# Altium PCB 两位数码管显示模块.PcbDoc
Units mm, origin at the board's own origin, x right, y up, seen from the top; angles counter-clockwise.
Board outline 152.4 x 101.6 mm, 2 copper layers (Top Layer, Bottom Layer); 15 components, 23 nets, 61 pads, 15 vias.
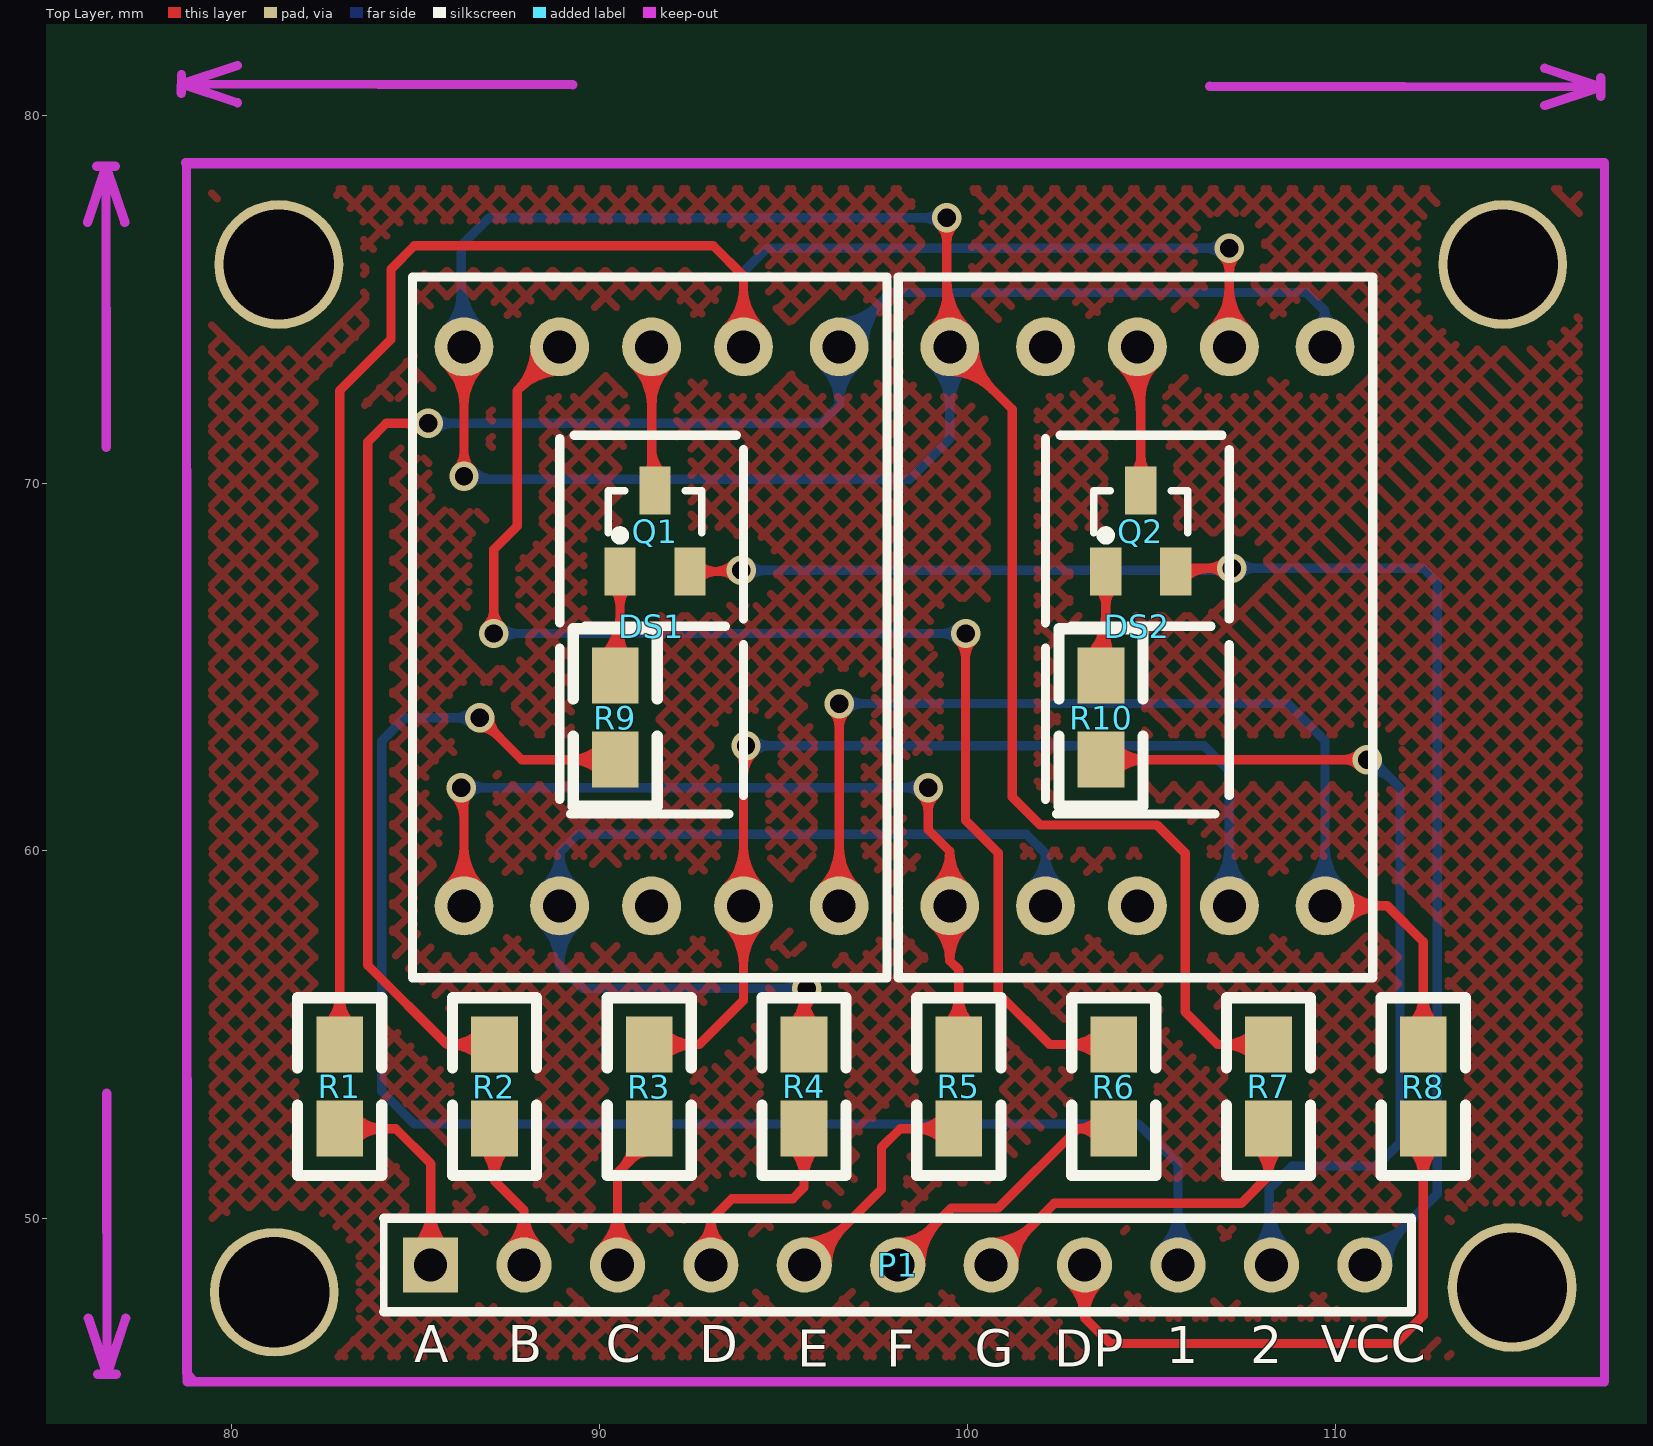
[diagram p0: Top Layer view]
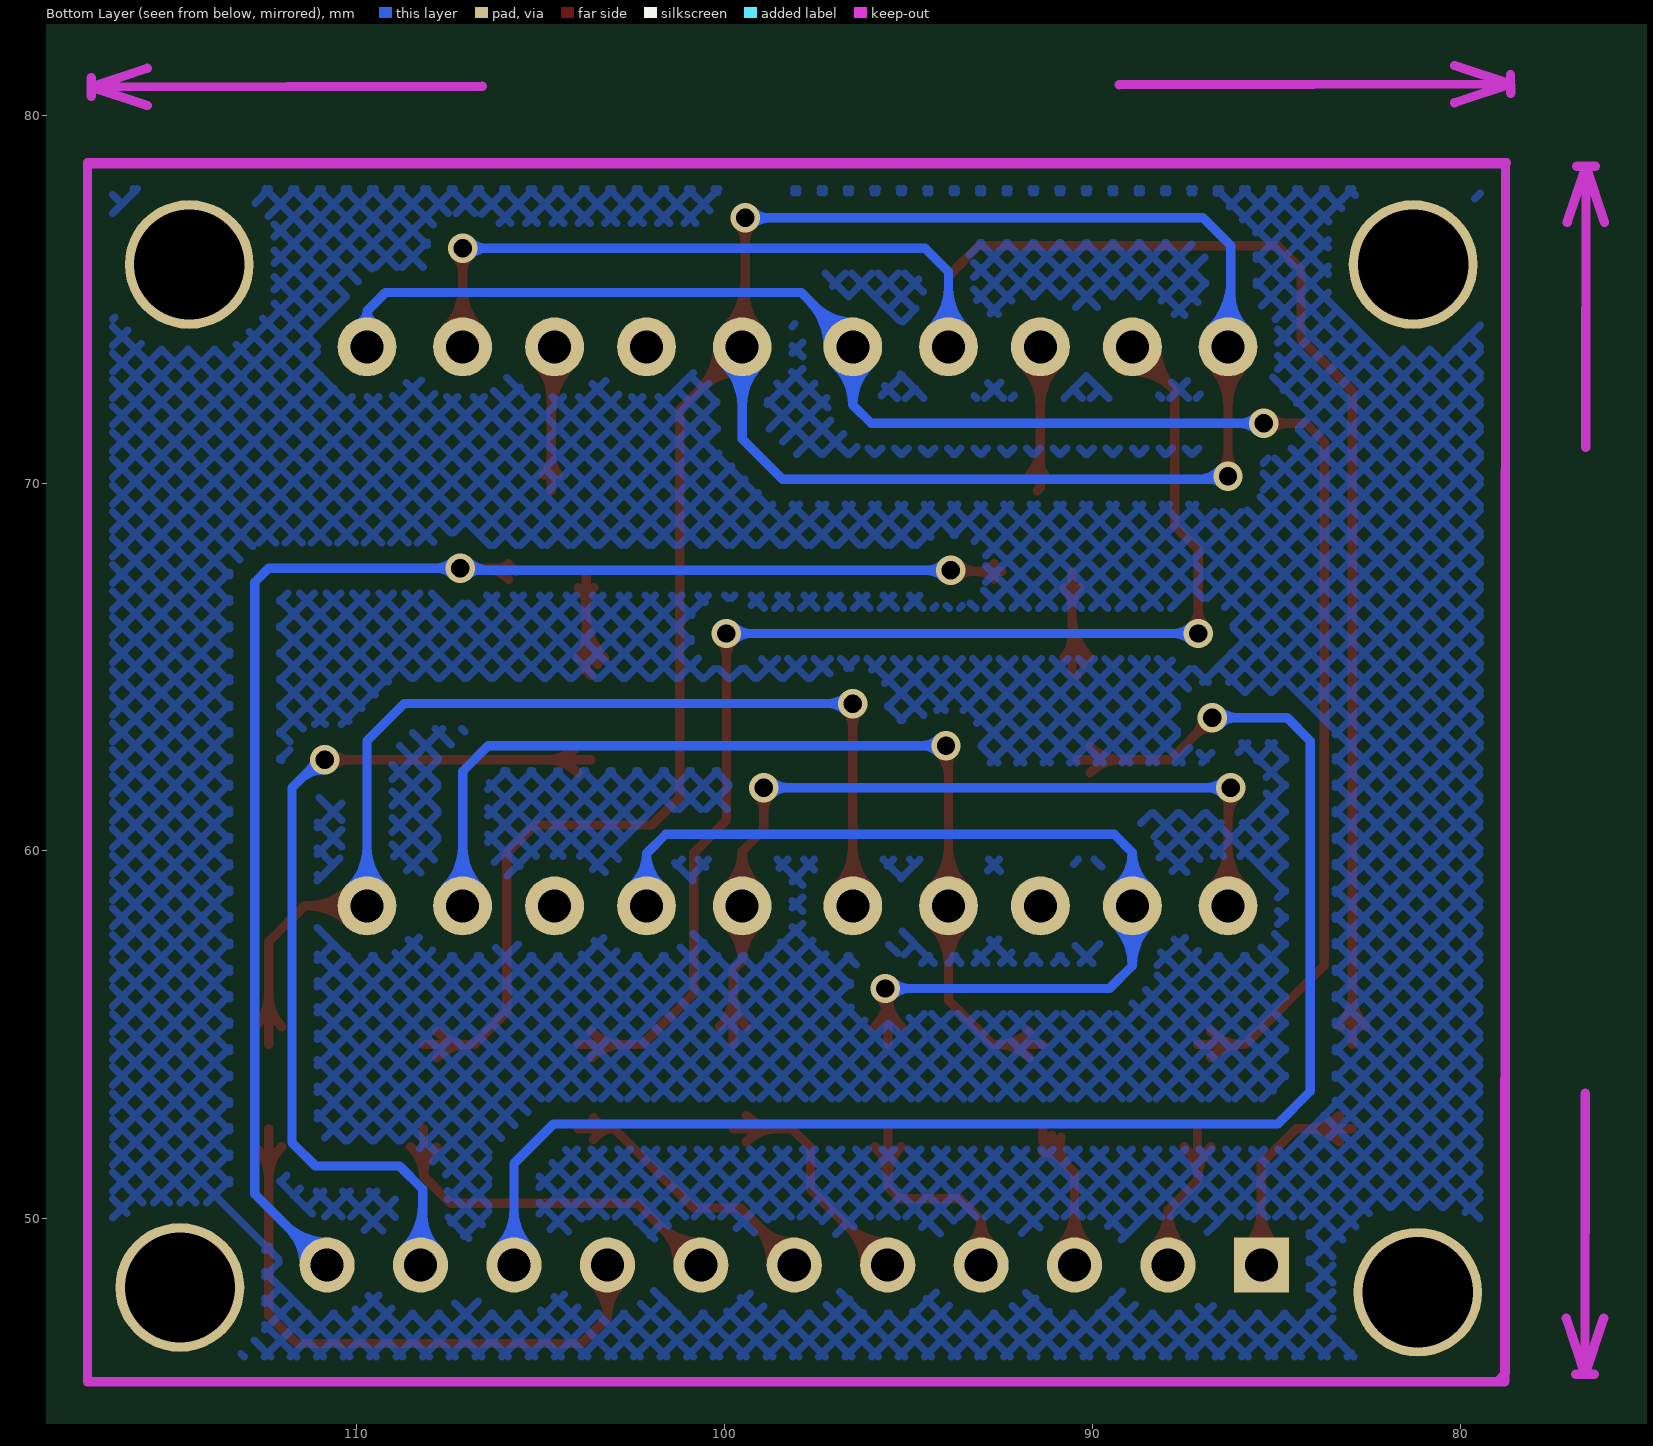
[diagram p1: Bottom Layer view, seen from below]

## Layer stack, top to bottom
Top Layer: signal copper 0.0356
Dielectric: dielectric 0.32, FR-4, Dk 4.8
Bottom Layer: signal copper 0.0356

## Board outline
25.4,25.4 177.8,25.4 177.8,127 25.4,127

## Design rules (kind name [scope] priority, off if disabled: settings)
Clearance [All] p1: gap=0.454
ComponentClearance [All] p1: gap=0.254 collisioncheckmode=0
PolygonConnect [All] p1: connectstyle=Relief reliefconductorwidth=0.254 reliefentries=4 polygonreliefangle="90 Angle"
RoutingVias [All] p1: holewidth=0.711 width=1.27 viastyle="Through Hole" minholewidth=0.711 minwidth=1.27 maxholewidth=0.711 maxwidth=1.27
SolderMaskExpansion [All] p1: expansion=0.102
TestPointUsage [All] p1: valid=0 allowmultiple=FALSE
Testpoint [All] p1: side=15 testpointundercomponent=TRUE minsize=1.016 maxsize=2.54 preferedsize=1.524 minholesize=0 maxholesize=1.016 preferedholesize=0.813 testpointgrid=0.025 style=1023 order=-539222988
Width [All] p1: maxlimit=0.254 minlimit=0.254 preferedwidth=0.254
17 further rules are at their usual default settings.

## Components (designator, comment, footprint, x,y, rotation, side; value= is the part's Value field where it differs from the comment)
DS1 "DLSMG_B" LED-BSR 91.313,63.627 r0 top
DS2 "DLSMG_B" LED-BSR 104.521,63.627 r0 top
P1 "PZ_10" HDR-10 98.044,48.768 r0 top
Q1 "TPSJG_PNP" SO-G3 92.456,68.58 r0 top
Q2 "TPSJG_PNP" SO-G3 105.664,68.58 r0 top
R1 "Res" 0805 82.931,52.451 r90 top
R2 "Res" 0805 87.14,52.451 r90 top
R3 "Res" 0805 91.349,52.451 r90 top
R4 "Res" 0805 95.558,52.451 r90 top
R5 "Res" 0805 99.768,52.451 r90 top
R6 "Res" 0805 103.977,52.451 r90 top
R7 "Res" 0805 108.186,52.451 r90 top
R8 "Res" 0805 112.395,52.451 r90 top
R9 "Res" 0805 90.424,62.484 r90 top
R10 "Res" 0805 103.632,62.484 r90 top

## Footprints (in the part's own frame and the unit in brackets; to place one, negate y for a bottom-side part, rotate by r counter-clockwise, add the part's x,y. Pads: shape width x height; smd on the part's side, far side on the other; paste and mask are expansions set on the pad)
0805 [mil]
  rect 60x50 smd: 1(0,0) 2(90,0)
  silkscreen extent -50,-45 140,45
HDR-10 [mm]
  rect 1.5x1.5 hole 0.9: 1(-12.639,-0.025)
  round 1.5 hole 0.9: 2(-10.099,-0.025) 3(-7.559,-0.025) 4(-5.019,-0.025) 5(-2.479,-0.025) 6(0.061,-0.025) 7(2.601,-0.025) 8(5.141,-0.025) 9(7.681,-0.025) 10(10.221,-0.025) 11(12.761,-0.025)
  silkscreen extent -13.91,-1.29 14.03,1.25
LED-BSR [mm] "独立数码管"
  round 1.6 hole 0.9: 1(-5,-5.119) 2(-2.4,-5.119) 3(0.1,-5.119) 4(2.6,-5.119) 5(5.2,-5.119) 6(5.2,10.081) 7(2.6,10.081) 8(0.1,10.081) 9(-2.4,10.081) 10(-5,10.081)
  silkscreen extent -6.4,-7.07 6.5,11.98
SO-G3 [mm]
  rect 0.85x1.3 smd: 1(-1.9,-0.983) 2(0,-0.983) 3(-0.95,1.217)
  silkscreen extent -2.23,-0.12 0.32,1.22

## Part data
DS1 DS2: "独立共阳数码管"
P1: "排针——10"
Q1 Q2: "贴片三极管——PNP"
R1 R2 R3 R4 R5 R6 R7 R8 R9 R10: "电阻"

## Free pads (board coordinates)
  round 3.5 hole 3: 0(81.153,48.006) 1(114.808,48.133) 2(114.554,75.946) 3(81.28,75.946)

## Via types
v1: diameter 0.8, hole 0.5, Top Layer to Bottom Layer, 15 vias

## Nets (pads, with @x,y where several pads share a name; then routed paths per layer and width w, separated by ;. In a path a pad name is that pad's centre, name@x,y a point inside that pad or via, vN(x,y) a via of type N, cw(c..) or ccw(c..) an arc to the next point about the centre after c; other vN are vias at no path point)
1: P1.1 R1.1 | length 11.3
  Top Layer w0.254: R1.1 84.455,52.451 85.405,51.501 P1.1 ; R1.1@83.29,52.092 cw(c84.157,51.225) 84.157,52.451 cw(c84.157,53.677) R1.1@83.29,52.81 ; P1.1@84.964,49.184 ccw(c83.901,50.247) 85.405,50.247 ccw(c86.909,50.247) P1.1@85.846,49.184 ; P1.1@85.144,49.004 ccw(c84.514,49.634) 85.405,49.634 ccw(c86.296,49.634) P1.1@85.666,49.004
2: P1.2 R2.1 | length 9.7
  Top Layer w0.254: R2.1@86.781,51.965 cw(c85.914,51.098) 87.14,51.098 cw(c88.367,51.098) R2.1@87.499,51.965 ; R2.1 87.14,51.036 87.945,50.231 ; P1.2@87.508,49.187 ccw(c86.48,50.231) 87.945,50.231 ; P1.2@87.686,49.006 ccw(c87.077,49.624) 87.945,49.624 ccw(c88.813,49.624) P1.2@88.204,49.006 ; P1.2 87.945,50.231 ; P1.2@88.382,49.187 cw(c89.41,50.231) 87.945,50.231
3: P1.3 R3.1 | length 10
  Top Layer w0.254: P1.3@90.044,49.184 ccw(c88.981,50.247) 90.485,50.247 ccw(c91.989,50.247) P1.3@90.926,49.184 ; P1.3@90.224,49.004 ccw(c89.594,49.634) 90.485,49.634 ccw(c91.376,49.634) P1.3@90.746,49.004 ; P1.3 90.485,51.242 91.349,52.106 R3.1 ; 90.594,51.351 ccw(c89.921,52.024) R3.1@90.852,52.219 ; 90.854,51.611 cw(c91.349,51.115) R3.1@91.349,51.816 ; 90.926,51.683 ccw(c90.469,52.139) R3.1@91.101,52.272
4: P1.4 R4.1 | length 9.3
  Top Layer w0.254: P1.4@92.657,49.246 ccw(c92.124,49.972) 93.025,49.972 ; P1.4 93.025,49.972 ; P1.4@93.393,49.246 cw(c93.926,49.972) 93.025,49.972 ; R4.1@95.199,51.965 cw(c94.332,51.098) 95.558,51.098 cw(c96.785,51.098) R4.1@95.918,51.965 ; R4.1 95.558,50.854 95.25,50.546 93.599,50.546 93.025,49.972
5: P1.5 R5.1 | length 12.1
  Top Layer w0.254: P1.5 95.606,48.743 97.663,50.8 97.663,51.943 98.171,52.451 R5.1 ; P1.5@95.565,49.112 ccw(c95.565,50.102) 96.265,49.402 ; P1.5@95.565,49.366 ccw(c95.565,50.969) 96.699,49.836 ; P1.5@95.934,48.743 cw(c96.726,48.743) 96.166,49.303 ; P1.5@96.188,48.743 cw(c97.593,48.743) 96.6,49.737 ; R5.1@99.408,52.092 ccw(c98.541,51.225) 98.541,52.451 ccw(c98.541,53.677) R5.1@99.408,52.81
6: P1.6 R6.1 | length 12
  Top Layer w0.254: P1.6@98.105,49.366 ccw(c98.105,50.662) 99.022,49.746 ; P1.6@98.146,48.743 P1.6 98.105,48.829 99.568,50.292 100.838,50.292 102.997,52.451 ; P1.6@98.474,48.743 cw(c99.572,48.743) 98.796,49.52 ; P1.6@98.728,48.743 cw(c100.44,48.743) 99.229,49.953 ; R6.1@103.562,52.158 ccw(c102.997,51.76) 102.997,52.451 ; R6.1@103.562,52.744 cw(c102.997,53.142) 102.997,52.451 ; R6.1 102.997,52.451
7: P1.7 R7.1 | length 15.4
  Top Layer w0.254: P1.7 100.686,48.743 102.362,50.419 107.442,50.419 108.186,51.163 ; P1.7@100.645,49.112 ccw(c100.645,50.102) 101.345,49.402 ; P1.7@100.645,49.366 ccw(c100.645,50.969) 101.779,49.836 ; P1.7@101.014,48.743 cw(c101.806,48.743) 101.246,49.303 ; P1.7@101.268,48.743 cw(c102.673,48.743) 101.68,49.737 ; R7.1@107.841,51.951 cw(c107.113,51.163) 108.186,51.163 ; R7.1 108.186,51.163 ; R7.1@108.531,51.951 ccw(c109.259,51.163) 108.186,51.163
8: P1.8 R8.1 | length 21.7
  Top Layer w0.254: P1.8@102.76,48.287 cw(c101.849,47.31) 103.185,47.31 ; P1.8@102.933,48.473 cw(c102.393,47.894) 103.185,47.894 cw(c103.977,47.894) P1.8@103.437,48.473 ; P1.8 103.185,47.31 ; P1.8@103.61,48.287 ccw(c104.521,47.31) 103.185,47.31 ; R8.1@112.036,51.965 cw(c111.169,51.098) 112.395,51.098 cw(c113.621,51.098) R8.1@112.754,51.965 ; R8.1 112.395,47.371 111.633,46.609 103.886,46.609 103.185,47.31
A: DS1.7 DS2.7 R1.2 | length 68.4
  Top Layer w0.254: R1.2@82.572,55.223 ccw(c81.705,56.09) 82.931,56.09 ccw(c84.157,56.09) R1.2@83.29,55.223 ; R1.2 82.931,72.517 84.328,73.914 84.328,75.819 84.963,76.454 93.091,76.454 93.913,75.632 DS1.7 ; DS1.7@93.437,74.183 ccw(c92.288,75.332) 93.913,75.332 ccw(c95.538,75.332) DS1.7@94.389,74.183 ; DS1.7@93.617,74.004 ccw(c92.901,74.719) 93.913,74.719 ccw(c94.925,74.719) DS1.7@94.209,74.004 ; DS2.7@106.645,74.183 ccw(c105.496,75.332) 107.121,75.332 ccw(c108.746,75.332) DS2.7@107.597,74.183 ; DS2.7@106.825,74.004 ccw(c106.109,74.719) 107.121,74.719 ccw(c108.133,74.719) DS2.7@107.417,74.004 ; v1@106.928,76.194 cw(c106.462,75.728) 107.121,75.728 cw(c107.78,75.728) v1@107.314,76.194 ; DS2.7 v1(107.121,76.387)
  Bottom Layer w0.254: DS1.7@93.437,74.183 ccw(c92.288,75.332) 93.913,75.332 ccw(c95.538,75.332) DS1.7@94.389,74.183 ; DS1.7@93.617,74.004 ccw(c92.901,74.719) 93.913,74.719 ccw(c94.925,74.719) DS1.7@94.209,74.004 ; DS1.7 93.913,75.752 94.548,76.387 v1(107.121,76.387) ; v1@106.928,76.194 ccw(c106.462,75.728) 106.462,76.387 ccw(c106.462,77.046) v1@106.928,76.58
B: DS1.6 DS2.6 R2.2 | length 61.4
  Top Layer w0.254: v1@85.151,71.435 ccw(c84.685,70.969) 84.685,71.628 ccw(c84.685,72.287) v1@85.151,71.821 ; v1(85.344,71.628) 84.201,71.628 83.693,71.12 83.693,56.896 85.852,54.737 R2.2 ; R2.2@86.781,54.378 ccw(c85.914,53.511) 85.914,54.737 ccw(c85.914,55.963) R2.2@86.781,55.096
  Bottom Layer w0.254: v1(85.344,71.628) 96.012,71.628 96.513,72.129 DS1.6 96.513,73.78 97.917,75.184 109.22,75.184 109.721,74.683 ; v1@85.537,71.435 cw(c86.003,70.969) 86.003,71.628 cw(c86.003,72.287) v1@85.537,71.821 ; DS1.6@96.047,73.222 cw(c94.998,72.129) 96.513,72.129 cw(c98.028,72.129) DS1.6@96.979,73.222 ; DS1.6@96.223,73.405 cw(c95.57,72.725) 96.513,72.725 cw(c97.456,72.725) DS1.6@96.803,73.405 ; DS1.6@96.513,74.127 ccw(c96.513,74.963) 97.105,74.372 ; DS1.6@96.513,74.381 ccw(c96.513,75.831) 97.538,74.805 ; DS1.6@96.932,73.708 cw(c98.118,73.708) 97.279,74.546 ; DS1.6@97.186,73.708 cw(c98.986,73.708) 97.713,74.98 ; DS2.6@109.482,74.337 ccw(c109.351,74.683) 109.721,74.683 ; DS2.6 109.721,74.683 ; DS2.6@109.96,74.337 cw(c110.091,74.683) 109.721,74.683
C: DS1.4 DS2.4 R3.2 | length 43.5
  Top Layer w0.254: R3.2 92.71,54.737 93.913,55.94 DS1.4 93.913,62.798 v1(93.98,62.865) ; R3.2@91.708,54.378 cw(c92.576,53.511) 92.576,54.737 cw(c92.576,55.963) R3.2@91.708,55.096 ; DS1.4@93.437,58.032 cw(c92.288,56.883) 93.913,56.883 cw(c95.538,56.883) DS1.4@94.389,58.032 ; DS1.4@93.437,58.983 ccw(c92.288,60.132) 93.913,60.132 ccw(c95.538,60.132) DS1.4@94.389,58.983 ; DS1.4@93.617,58.211 cw(c92.901,57.496) 93.913,57.496 cw(c94.925,57.496) DS1.4@94.209,58.211 ; DS1.4@93.617,58.804 ccw(c92.901,59.519) 93.913,59.519 ccw(c94.925,59.519) DS1.4@94.209,58.804 ; v1@93.787,62.672 cw(c93.483,62.368) 93.913,62.368 ; 93.913,62.044 cw(c94.801,62.044) v1@94.173,62.672
  Bottom Layer w0.254: v1(93.98,62.865) 106.426,62.865 107.121,62.17 DS2.4 ; v1@94.173,62.672 cw(c94.639,62.206) 94.639,62.865 cw(c94.639,63.524) v1@94.173,63.058 ; DS2.4@106.645,58.983 ccw(c105.496,60.132) 107.121,60.132 ccw(c108.746,60.132) DS2.4@107.597,58.983 ; DS2.4@106.825,58.804 ccw(c106.109,59.519) 107.121,59.519 ccw(c108.133,59.519) DS2.4@107.417,58.804
D: DS1.2 DS2.2 R4.2 | length 41.6
  Top Layer w0.254: R4.2@95.199,55.223 ccw(c94.332,56.09) 95.558,56.09 ccw(c96.785,56.09) R4.2@95.918,55.223 ; v1@95.438,56.068 cw(c95.147,55.777) 95.558,55.777 ; R4.2 95.558,56.188 v1(95.631,56.261) ; R4.2@95.558,55.427 cw(c96.465,55.427) v1@95.824,56.068
  Bottom Layer w0.254: DS1.2@88.437,58.032 cw(c87.289,56.883) 88.913,56.883 ; DS1.2@88.479,59.022 ccw(c87.689,59.957) 88.913,59.957 ; DS1.2@88.617,58.211 cw(c87.902,57.496) 88.913,57.496 cw(c89.924,57.496) DS1.2@89.209,58.211 ; DS1.2@88.643,58.828 ccw(c88.151,59.41) 88.913,59.41 ccw(c89.675,59.41) DS1.2@89.183,58.828 ; DS1.2@89.347,59.022 cw(c90.137,59.957) 88.913,59.957 ; DS1.2@89.389,58.032 ccw(c90.537,56.883) 88.913,56.883 ; v1@95.438,56.068 ccw(c94.972,55.602) 94.972,56.261 ccw(c94.972,56.92) v1@95.438,56.454 ; v1(95.631,56.261) 89.535,56.261 88.913,56.883 ; DS2.2@101.694,59.028 ccw(c100.952,59.931) 102.121,59.931 ; DS2.2@101.855,58.831 ccw(c101.393,59.394) 102.121,59.394 ccw(c102.849,59.394) DS2.2@102.387,58.831 ; DS2.2 102.121,59.931 ; DS2.2@102.548,59.028 cw(c103.29,59.931) 102.121,59.931 ; 88.913,56.883 DS1.2 88.913,59.957 ; 88.913,59.957 89.408,60.452 101.6,60.452 102.121,59.931
DP: DS1.5 DS2.5 R8.2 | length 45.9
  Top Layer w0.254: DS1.5@96.037,58.983 ccw(c94.888,60.132) 96.513,60.132 ccw(c98.138,60.132) DS1.5@96.989,58.983 ; DS1.5@96.217,58.804 ccw(c95.501,59.519) 96.513,59.519 ccw(c97.525,59.519) DS1.5@96.809,58.804 ; v1@96.327,63.815 cw(c95.878,63.366) 96.513,63.366 ; DS1.5 96.513,64.001 v1(96.52,64.008) ; 96.513,63.332 cw(c97.196,63.332) v1@96.713,63.815 ; DS2.5 111.418,58.508 112.395,57.531 R8.2 ; DS2.5@110.017,58.211 cw(c110.733,57.496) 110.733,58.508 cw(c110.733,59.519) DS2.5@110.017,58.804 ; DS2.5@110.197,58.032 cw(c111.346,56.883) 111.346,58.508 cw(c111.346,60.132) DS2.5@110.197,58.983 ; R8.2@112.036,55.223 ccw(c111.169,56.09) 112.395,56.09 ccw(c113.621,56.09) R8.2@112.754,55.223
  Bottom Layer w0.254: v1(96.52,64.008) 108.712,64.008 109.721,62.999 DS2.5 ; v1@96.713,63.815 cw(c97.179,63.349) 97.179,64.008 cw(c97.179,64.667) v1@96.713,64.201 ; DS2.5@109.245,58.983 ccw(c108.096,60.132) 109.721,60.132 ccw(c111.346,60.132) DS2.5@110.197,58.983 ; DS2.5@109.425,58.804 ccw(c108.709,59.519) 109.721,59.519 ccw(c110.733,59.519) DS2.5@110.017,58.804
E: DS1.1 DS2.1 R5.2 | length 40.7
  Top Layer w0.254: DS1.1@85.837,58.983 ccw(c84.688,60.132) 86.313,60.132 ccw(c87.938,60.132) DS1.1@86.789,58.983 ; DS1.1@86.017,58.804 ccw(c85.301,59.519) 86.313,59.519 ccw(c87.325,59.519) DS1.1@86.609,58.804 ; v1@86.04,61.529 cw(c85.381,60.87) 86.313,60.87 ; v1(86.233,61.722) 86.313,61.642 DS1.1 ; 86.313,61.256 cw(c86.699,61.256) v1@86.426,61.529 ; v1@98.74,61.529 cw(c98.274,61.063) 98.933,61.063 cw(c99.592,61.063) v1@99.126,61.529 ; v1(98.933,61.722) 98.933,60.579 99.521,59.991 ; DS2.1@99.076,58.003 cw(c98.204,57.016) 99.521,57.016 ; DS2.1@99.078,59.014 ccw(c98.223,59.991) 99.521,59.991 ; DS2.1@99.244,58.193 cw(c98.701,57.579) 99.521,57.579 cw(c100.341,57.579) DS2.1@99.798,58.193 ; DS2.1@99.245,58.823 ccw(c98.713,59.431) 99.521,59.431 ccw(c100.329,59.431) DS2.1@99.797,58.823 ; R5.2@99.408,55.223 ccw(c98.541,56.09) 99.768,56.09 ccw(c100.994,56.09) R5.2@100.127,55.223 ; R5.2 99.768,56.769 99.521,57.016 ; DS2.1@99.964,59.014 cw(c100.819,59.991) 99.521,59.991 ; DS2.1@99.966,58.003 ccw(c100.838,57.016) 99.521,57.016 ; 99.521,57.016 DS2.1 99.521,59.991
  Bottom Layer w0.254: v1(86.233,61.722) v1(98.933,61.722) ; v1@86.426,61.529 cw(c86.892,61.063) 86.892,61.722 cw(c86.892,62.381) v1@86.426,61.915 ; v1@98.74,61.529 ccw(c98.274,61.063) 98.274,61.722 ccw(c98.274,62.381) v1@98.74,61.915
F: DS1.9 R6.2 | length 45.3
  Top Layer w0.254: v1@86.929,66.106 ccw(c86.463,66.572) 87.122,66.572 ccw(c87.781,66.572) v1@87.315,66.106 ; v1(87.122,65.913) 87.122,68.199 87.757,68.834 87.757,72.517 88.913,73.673 DS1.9 ; 87.774,72.534 ccw(c86.649,73.66) DS1.9@88.24,73.693 ; 87.823,72.583 cw(c88.913,71.493) DS1.9@88.913,73.035 ; 88.195,72.955 ccw(c87.473,73.677) DS1.9@88.494,73.699 ; 88.257,73.017 cw(c88.913,72.361) DS1.9@88.913,73.289 ; v1@99.756,65.72 cw(c99.29,65.254) 99.949,65.254 cw(c100.608,65.254) v1@100.142,65.72 ; v1(99.949,65.913) 99.949,60.833 100.838,59.944 100.838,56.134 102.235,54.737 R6.2 ; R6.2@103.618,54.378 ccw(c102.75,53.511) 102.75,54.737 ccw(c102.75,55.963) R6.2@103.618,55.096
  Bottom Layer w0.254: v1(87.122,65.913) v1(99.949,65.913) ; v1@87.315,65.72 cw(c87.781,65.254) 87.781,65.913 cw(c87.781,66.572) v1@87.315,66.106 ; v1@99.756,65.72 ccw(c99.29,65.254) 99.29,65.913 ccw(c99.29,66.572) v1@99.756,66.106
G: DS1.10 DS2.10 R7.2 | length 91.6
  Top Layer w0.254: DS1.10@85.837,73.232 cw(c84.688,72.083) 86.313,72.083 cw(c87.938,72.083) DS1.10@86.789,73.232 ; DS1.10@86.017,73.411 cw(c85.301,72.696) 86.313,72.696 cw(c87.325,72.696) DS1.10@86.609,73.411 ; v1@86.12,70.377 ccw(c85.654,70.843) 86.313,70.843 ccw(c86.972,70.843) v1@86.506,70.377 ; v1(86.313,70.184) DS1.10 ; DS2.10@99.045,74.183 ccw(c98.089,75.139) 99.441,75.139 ; DS2.10@99.225,74.004 ccw(c98.703,74.526) 99.441,74.526 ; v1@99.248,77.023 cw(c98.782,76.557) 99.441,76.557 cw(c100.1,76.557) v1@99.634,77.023 ; 99.441,74.912 ccw(c100.726,74.912) DS2.10@99.817,74.004 ; 99.441,75.526 ccw(c101.339,75.526) DS2.10@99.997,74.183 ; v1(99.441,77.216) 99.441,73.788 DS2.10 101.219,72.01 101.219,61.468 101.981,60.706 105.156,60.706 105.918,59.944 105.918,55.626 106.807,54.737 R7.2 ; DS2.10@99.521,73.035 cw(c99.521,71.41) 100.67,72.559 cw(c101.819,73.708) DS2.10@100.194,73.708 ; DS2.10@99.521,73.289 cw(c99.521,72.277) 100.236,72.992 cw(c100.952,73.708) DS2.10@99.94,73.708 ; R7.2@107.827,54.378 ccw(c106.959,53.511) 106.959,54.737 ccw(c106.959,55.963) R7.2@107.827,55.096
  Bottom Layer w0.254: DS1.10@85.837,74.183 ccw(c84.881,75.139) 86.233,75.139 ; DS1.10@86.017,74.004 ccw(c85.495,74.526) 86.233,74.526 ; 86.233,74.912 ccw(c87.518,74.912) DS1.10@86.609,74.004 ; 86.233,75.526 ccw(c88.131,75.526) DS1.10@86.789,74.183 ; v1(86.313,70.184) 86.393,70.104 98.425,70.104 99.521,71.2 DS2.10 ; DS1.10 86.233,73.788 86.233,76.454 86.995,77.216 v1(99.441,77.216) ; v1@86.506,69.991 cw(c86.779,69.718) 86.779,70.104 ; v1@86.506,70.377 ccw(c87.165,71.036) 87.165,70.104 ; DS2.10@99.045,73.232 cw(c97.896,72.083) 99.521,72.083 cw(c101.146,72.083) DS2.10@99.997,73.232 ; DS2.10@99.225,73.411 cw(c98.509,72.696) 99.521,72.696 cw(c100.533,72.696) DS2.10@99.817,73.411 ; v1@99.248,77.023 ccw(c98.782,76.557) 98.782,77.216 ccw(c98.782,77.875) v1@99.248,77.409
NetDS1_8: DS1.8 Q1.3 | length 9.2
  Top Layer w0.254: DS1.8@90.937,73.232 cw(c89.788,72.083) 91.413,72.083 cw(c93.038,72.083) DS1.8@91.889,73.232 ; DS1.8@91.117,73.411 cw(c90.401,72.696) 91.413,72.696 cw(c92.425,72.696) DS1.8@91.709,73.411 ; Q1.3@91.295,70.233 ccw(c91.01,70.518) 91.413,70.518 ; 91.413,70.966 ccw(c92.449,70.966) Q1.3@91.717,70.233 ; DS1.8 91.413,69.89 Q1.3
NetDS2_8: DS2.8 Q2.3 | length 8.7
  Top Layer w0.254: DS2.8@104.145,73.232 cw(c102.772,71.859) 104.714,71.859 ; DS2.8@104.325,73.411 cw(c103.385,72.472) 104.714,72.472 ; Q2.3@104.503,70.233 ccw(c103.994,70.742) 104.714,70.742 ccw(c105.433,70.742) Q2.3@104.925,70.233 ; DS2.8 104.714,73.615 Q2.3 ; 104.714,72.307 cw(c106.022,72.307) DS2.8@105.097,73.232
NetQ1_1: Q1.1 R9.2 | length 6.8
  Top Layer w0.254: R9.2@90.065,65.256 ccw(c88.879,66.442) 90.556,66.442 ; R9.2@90.244,65.077 ccw(c89.493,65.828) 90.556,65.828 ; Q1.1@90.345,67.161 cw(c89.836,66.653) 90.556,66.653 cw(c91.275,66.653) Q1.1@90.766,67.161 ; R9.2 90.556,64.902 Q1.1 ; 90.556,65.805 ccw(c91.332,65.805) R9.2@90.783,65.256
NetQ2_1: Q2.1 R10.2 | length 6.8
  Top Layer w0.254: R10.2@103.273,65.256 ccw(c102.087,66.442) 103.764,66.442 ; R10.2@103.452,65.077 ccw(c102.701,65.828) 103.764,65.828 ; Q2.1@103.553,67.161 cw(c103.044,66.653) 103.764,66.653 cw(c104.483,66.653) Q2.1@103.974,67.161 ; R10.2 103.764,64.902 Q2.1 ; 103.764,65.805 ccw(c104.54,65.805) R10.2@103.991,65.256
VCC: P1.11 Q1.2 Q2.2 | length 52.7
  Top Layer w0.254: Q1.2 93.82,67.597 v1(93.853,67.63) ; Q1.2@92.667,67.386 cw(c93.175,66.878) 93.175,67.597 cw(c93.175,68.317) Q1.2@92.667,67.808 ; 93.114,67.597 ccw(c93.114,68.369) v1@93.66,67.823 ; 93.274,67.597 cw(c93.274,67.051) v1@93.66,67.437 ; Q2.2 105.758,67.691 v1(107.188,67.691) ; Q2.2@105.875,67.386 cw(c106.61,66.651) 106.61,67.691 ; Q2.2@105.875,67.808 ccw(c106.157,68.09) 106.157,67.691 ; v1@106.995,67.498 ccw(c106.529,67.032) 106.529,67.691 ccw(c106.529,68.35) v1@106.995,67.884
  Bottom Layer w0.254: v1(93.853,67.63) 107.127,67.63 v1(107.188,67.691) 112.395,67.691 112.776,67.31 112.776,50.673 110.846,48.743 P1.11 ; v1@94.046,67.437 cw(c94.512,66.971) 94.512,67.63 cw(c94.512,68.289) v1@94.046,67.823 ; 106.382,67.63 ccw(c106.382,68.497) v1@106.995,67.884 ; 106.675,67.63 cw(c106.675,67.178) v1@106.995,67.498 ; v1@107.381,67.498 cw(c107.847,67.032) 107.847,67.691 cw(c107.847,68.35) v1@107.381,67.884 ; P1.11@110.805,49.112 ccw(c110.805,50.102) 111.505,49.402 ; P1.11@110.805,49.366 ccw(c110.805,50.969) 111.939,49.836 ; P1.11@111.174,48.743 cw(c111.966,48.743) 111.406,49.303 ; P1.11@111.428,48.743 cw(c112.833,48.743) 111.84,49.737
WEI1: P1.9 R9.1 | length 49.6
  Top Layer w0.254: v1@86.741,63.354 cw(c86.741,62.695) 87.207,63.161 cw(c87.673,63.627) v1@87.014,63.627 ; v1(86.741,63.627) 87.884,62.484 R9.1 ; R9.1@90.065,62.125 ccw(c89.198,61.258) 89.198,62.484 ccw(c89.198,63.71) R9.1@90.065,62.843
  Bottom Layer w0.254: v1@86.548,63.434 ccw(c86.082,62.968) 86.082,63.627 ccw(c86.082,64.286) v1@86.548,63.82 ; v1(86.741,63.627) 84.709,63.627 84.074,62.992 84.074,53.467 84.963,52.578 104.648,52.578 105.725,51.501 P1.9 ; P1.9@105.284,49.184 ccw(c104.221,50.247) 105.725,50.247 ccw(c107.229,50.247) P1.9@106.166,49.184 ; P1.9@105.464,49.004 ccw(c104.834,49.634) 105.725,49.634 ccw(c106.616,49.634) P1.9@105.986,49.004
WEI2: P1.10 R10.1 | length 31.5
  Top Layer w0.254: R10.1 v1(110.871,62.484) ; R10.1@103.991,62.125 cw(c104.858,61.258) 104.858,62.484 cw(c104.858,63.71) R10.1@103.991,62.843 ; v1@110.678,62.291 ccw(c110.212,61.825) 110.212,62.484 ccw(c110.212,63.143) v1@110.678,62.677
  Bottom Layer w0.254: P1.10@107.824,49.184 ccw(c106.908,50.1) 108.204,50.1 ; 108.204,49.781 ccw(c109.303,49.781) P1.10@108.526,49.004 ; 108.204,50.394 ccw(c109.916,50.394) P1.10@108.706,49.184 ; P1.10 108.204,48.804 108.204,50.8 108.839,51.435 111.125,51.435 111.76,52.07 111.76,61.722 110.998,62.484 v1(110.871,62.484) ; v1@110.871,62.211 cw(c110.871,61.245) 111.554,61.928 ; v1@111.144,62.484 ccw(c111.496,62.484) 111.247,62.235
pads on no net: DS1.3 DS2.3 DS2.9

## Polygon pours and split planes (outlines as drawn)
no net on Top Layer (hatched 45Degree grid 0.508 track 0.203): 78.613,78.501 78.613,45.354 117.221,45.354 117.221,78.501
no net on Bottom Layer (hatched 45Degree grid 0.508 track 0.203): 78.152,78.486 116.76,78.486 116.76,45.339 78.152,45.339

## Keep-outs
Keep-Out Layer:
  lines w0.254: 76.074,77.089 76.581,78.613 ; 76.099,47.299 76.608,45.776 ; 76.327,78.613 76.835,78.613 ; 76.354,45.776 76.862,45.776 ; 76.587,70.98 76.581,78.613 ; 76.602,53.409 76.608,45.776 ; 77.09,77.089 76.581,78.613 ; 77.115,47.3 76.608,45.776 ; 78.629,80.599 78.63,81.107 ; 78.74,78.715 117.323,78.715 ; 80.152,80.342 78.63,80.853 ; 80.155,81.358 78.63,80.853 ; 89.267,80.831 78.63,80.853 ; 106.584,80.794 117.221,80.772 ; 115.696,80.267 117.221,80.772 ; 115.698,81.283 117.221,80.772 ; 117.22,80.518 117.222,81.026 ; 78.765,78.689 117.297,78.689 117.323,78.715 ; 78.765,78.689 78.765,45.796 78.994,45.568 117.323,45.568 ; 78.765,78.689 78.791,45.568 117.323,45.568 ; 117.323,45.568 117.323,78.715 ; 117.323,45.568 117.323,78.715
  text "38.5916 (mm)" at 89.519,79.916 h1.52 r359.88
  text "32.8372 (mm)" at 75.673,70.725 h1.52 r270.05

## Silkscreen, mask and mechanical layers (free items; w line width, h text height)
Top Overlay:
  text "A" at 84.963,46.101 h1
  text "B" at 87.503,46.101 h1
  text "C" at 90.17,46.101 h1
  text "D" at 92.71,46.101 h1
  text "VCC" at 109.601,46.101 h1
  text "1" at 105.41,46.071 h1
  text "2" at 107.696,46.071 h1
  text "E" at 95.377,45.974 h1
  text "F" at 97.79,45.974 h1
  text "G" at 100.203,45.974 h1
  text "DP" at 102.362,45.974 h1
Mechanical 1:
  lines w0.254: 78.765,78.689 78.791,45.568 117.323,45.568 117.323,78.689 117.297,78.715 78.791,78.715 78.765,78.689